# EAGLE board uino-1284p (EAGLE 5.11)
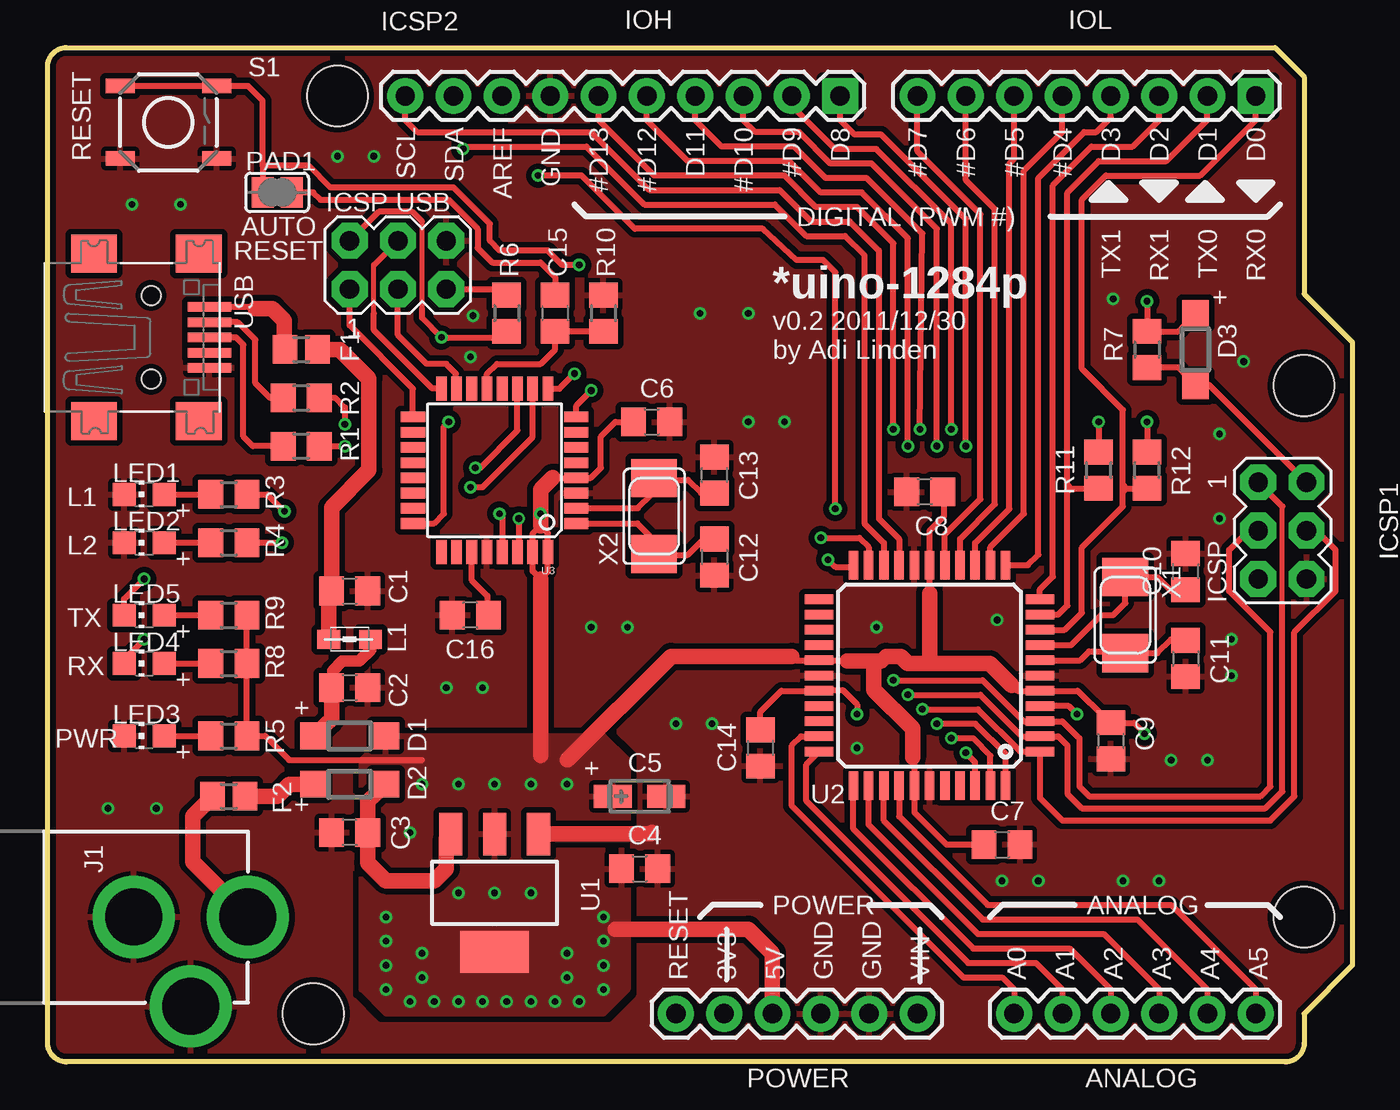
[diagram p0: board, top side]
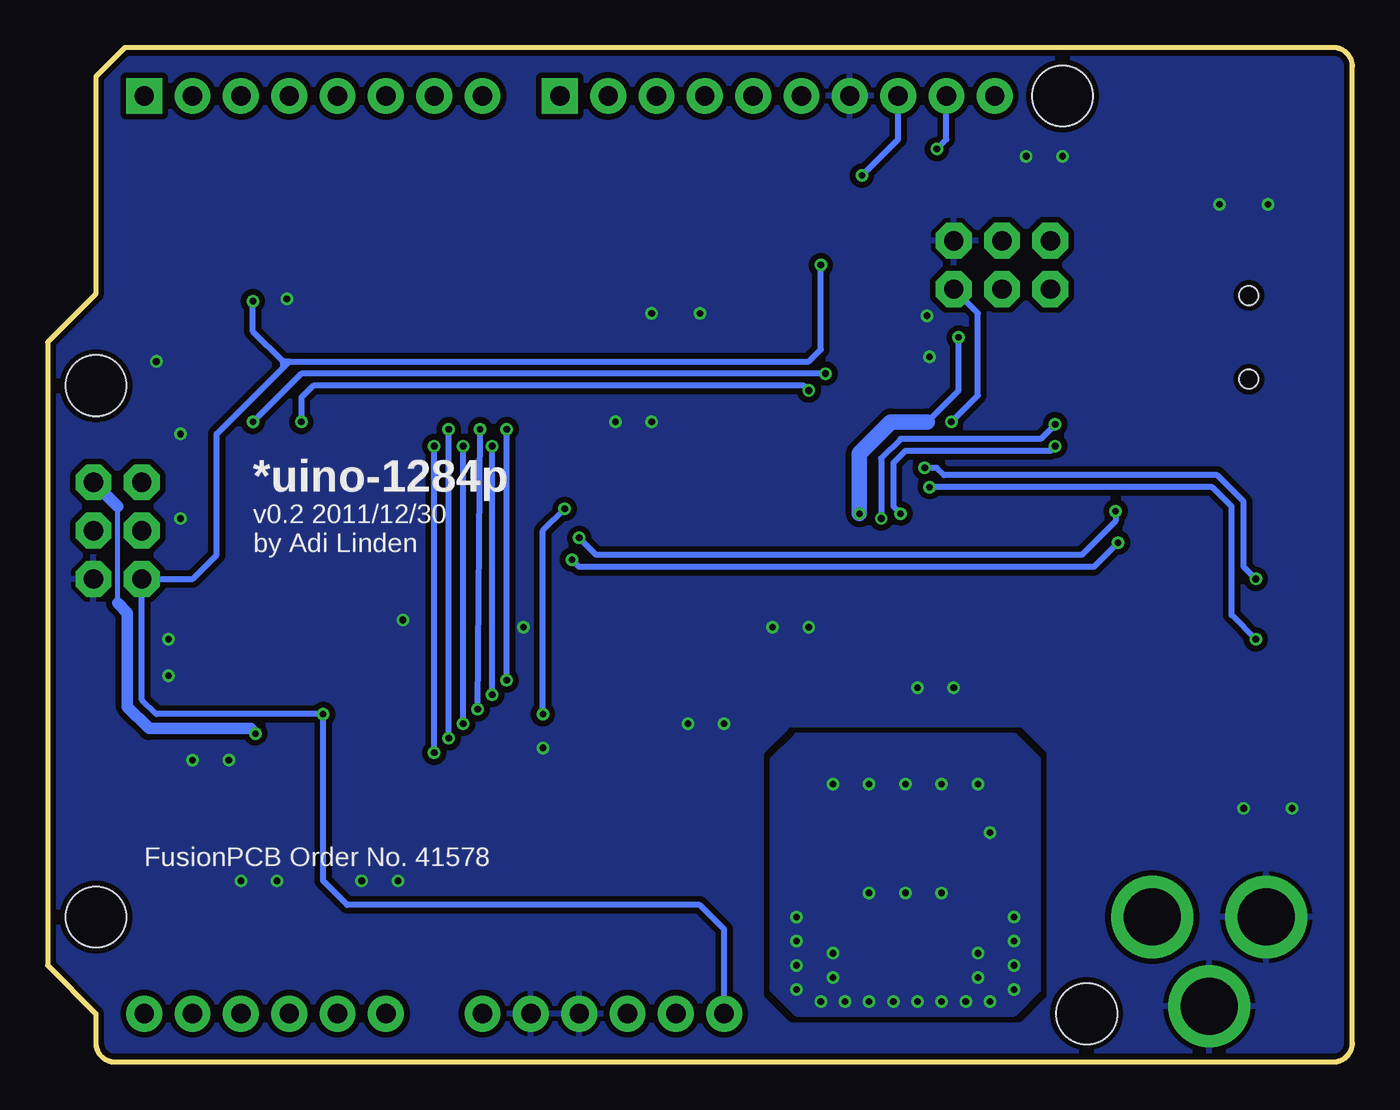
[diagram p1: board, bottom side, seen from below]

Size 68.58 x 53.34 mm. Coordinates in mm from the lower left corner, seen from the top.
Outline: 64.52,53.34 66.04,51.82 66.04,40.39 68.58,37.85 68.58,5.08 66.04,2.54 66.04,1 arc-90 65.04,0 1,0 arc-90 0,1 0,52.34 arc-90 1,53.34 64.52,53.34
Copper layers (1*16): Top 0.035mm / dielectric 1.5mm / Bottom 0.035mm
Design rules "Fusion_eagle_rule_v1.1": minimum track width 6mil, minimum drill 12mil, track to track 6mil, track to pad 6mil, pad to pad 6mil, via to via 6mil, smd to smd 0mil, copper to edge 10mil, drill to drill 10mil, minimum pad ring 10mil, minimum via ring 6mil, stop-mask expansion 2mil, vias tented up to drill 100mil, thermal gap 10mil
Holes 3.2 mm at 66.04,35.56 66.04,7.62 15.24,50.8 13.97,2.54

## Footprints (pad centres in the part's own frame; a part is rotated, then mirrored left to right if it is on the bottom)
1X06 = drill 1.016 pad 1.88 round: 1 0,0; 2 2.54,0; 3 5.08,0; 4 7.62,0; 5 10.16,0; 6 12.7,0
C0805 = smd 1.3 x 1.5: 1 -0.95,0; 2 0.95,0
CT3216 = smd 2 x 1.2: + -1.4,0; - 1.4,0
SOD123 = smd 1.4 x 1.4: A 1.9,0; C -1.9,0
R0805 = smd 1.3 x 1.5: 1 -0.85,0; 2 0.85,0
2X03 = drill 1.016 pad 1.88 octagon: 1 -2.54,-1.27; 2 -2.54,1.27; 3 0,-1.27; 4 0,1.27; 5 2.54,-1.27; 6 2.54,1.27
1X10 = drill 1.016 pad 1.88 square: 1 0,0 | drill 1.016 pad 1.88 round: 2 2.54,0; 3 5.08,0; 4 7.62,0; 5 10.16,0; 6 12.7,0; 7 15.24,0; 8 17.78,0; 9 20.32,0; 10 22.86,0
1X08 = drill 1.016 pad 1.88 square: 1 0,0 | drill 1.016 pad 1.88 round: 2 2.54,0; 3 5.08,0; 4 7.62,0; 5 10.16,0; 6 12.7,0; 7 15.24,0; 8 17.78,0
POWER_JACK_PTH = drill 2.997 pad 4.318 round: GND 0,7.7; GNDBREAK 4.7,10.7; PWR 0,13.7
0805 = smd 1.2 x 1: 1 -1.1,0; 2 1.1,0
CHIP-LED0805 = smd 1.2 x 1.2: A 0,-1.05; C 0,1.05
SJ = smd 1.168 x 1.6: 1 -0.762,0; 2 0.762,0
R0805' = smd 1.3 x 1.5: 1 -0.95,0; 2 0.95,0
TACTILE_SWITCH_SMD = smd 1.524 x 0.762: 1 -2.54,1.905; 2 2.54,1.905; 3 -2.54,-1.905; 4 2.54,-1.905
SOT223 = smd 1.219 x 2.235: 1 -2.311,-3.099; 2 0,-3.099; 3 2.311,-3.099 | smd 3.6 x 2.2: 4 0,3.099
TQFP44 = smd 1.5 x 0.5: 1 -5.8,4; 2 -5.8,3.2; 3 -5.8,2.4; 4 -5.8,1.6; 5 -5.8,0.8; 6 -5.8,0; 7 -5.8,-0.8; 8 -5.8,-1.6; 9 -5.8,-2.4; 10 -5.8,-3.2; 11 -5.8,-4; 23 5.8,-4; 24 5.8,-3.2; 25 5.8,-2.4; 26 5.8,-1.6; 27 5.8,-0.8; 28 5.8,0; 29 5.8,0.8; 30 5.8,1.6; 31 5.8,2.4; 32 5.8,3.2; 33 5.8,4 | smd 0.5 x 1.5: 12 -4,-5.8; 13 -3.2,-5.8; 14 -2.4,-5.8; 15 -1.6,-5.8; 16 -0.8,-5.8; 17 0,-5.8; 18 0.8,-5.8; 19 1.6,-5.8; 20 2.4,-5.8; 21 3.2,-5.8; 22 4,-5.8; 34 4,5.8; 35 3.2,5.8; 36 2.4,5.8; 37 1.6,5.8; 38 0.8,5.8; 39 0,5.8; 40 -0.8,5.8; 41 -1.6,5.8; 42 -2.4,5.8; 43 -3.2,5.8; 44 -4,5.8
TQFP32-08 = smd 1.27 x 0.559: 1 -4.293,2.8; 2 -4.293,2; 3 -4.293,1.2; 4 -4.293,0.4; 5 -4.293,-0.4; 6 -4.293,-1.2; 7 -4.293,-2; 8 -4.293,-2.8; 17 4.293,-2.8; 18 4.293,-2; 19 4.293,-1.2; 20 4.293,-0.4; 21 4.293,0.4; 22 4.293,1.2; 23 4.293,2; 24 4.293,2.8 | smd 0.559 x 1.27: 9 -2.8,-4.293; 10 -2,-4.293; 11 -1.2,-4.293; 12 -0.4,-4.293; 13 0.4,-4.293; 14 1.2,-4.293; 15 2,-4.293; 16 2.8,-4.293; 25 2.8,4.293; 26 2,4.293; 27 1.2,4.293; 28 0.4,4.293; 29 -0.4,4.293; 30 -1.2,4.293; 31 -2,4.293; 32 -2.8,4.293
USB-MINIB = smd 0.5 x 2.308: D+ 0,4.064; D- -0.8,4.064; GND 1.6,4.064; ID 0.8,4.064; VBUS -1.6,4.064 | smd 2 x 2.4: GND1 -4.4,-2; GND2 -4.4,3.5; GND3 4.4,3.5; GND4 4.4,-2 | hole 1: -2.2,1; 2.2,1
NX5032 = smd 2 x 2.4: P$1 2,0; P$2 -2,0

## Placement (x,y rotation side)
ANALOG  6x1  [1X06]  50.8,2.54 0 top
C1  0.01u  [C0805]  15.88,24.77 0 top
C2  0.1u  [C0805]  15.88,19.68 0 top
C3  0.1u  [C0805]  15.88,12.06 180 top
C4  0.1u  [C0805]  31.11,10.16 0 top
C5  10u  [CT3216]  31.11,13.97 0 top
C6  0.1u  [C0805]  31.75,33.66 0 top
C7  0.1u  [C0805]  50.16,11.43 0 top
C8  0.1u  [C0805]  46.1,29.97 180 top
C9  0.1u  [C0805]  55.88,16.89 270 top
C10  22p  [C0805]  59.82,25.78 90 top
C11  22p  [C0805]  59.82,21.21 270 top
C12  22p  [C0805]  35.05,26.54 270 top
C13  22p  [C0805]  35.05,30.86 90 top
C14  0.1u  [C0805]  37.47,16.51 270 top
C15  0.1u  [C0805]  26.67,39.37 270 top
C16  1u  [C0805]  22.23,23.5 180 top
D1  1A  [SOD123]  15.88,17.14 180 top
D2  1A  [SOD123]  15.88,14.61 180 top
D3  500mA  [SOD123]  60.33,37.47 90 top
F1  500mA  [R0805]  13.34,37.47 0 top
F2  800mA  [R0805]  9.53,13.97 0 top
ICSP1  [2X03]  64.9,27.94 270 top
ICSP2  [2X03]  18.41,41.91 0 top
IOH  10x1  [1X10]  41.66,50.8 180 top
IOL  8x1  [1X08]  63.5,50.8 180 top
J1  POWER_JACKPTH  [POWER_JACK_PTH]  -3.17,7.62 270 top
L1  Ferrite  [0805]  15.88,22.23 0 top
LED1  L1 (Red)  [CHIP-LED0805]  5.08,29.84 90 top
LED2  L2 (Red)  [CHIP-LED0805]  5.08,27.3 90 top
LED3  PWR (Green)  [CHIP-LED0805]  5.08,17.14 90 top
LED4  RX (Yellow)  [CHIP-LED0805]  5.08,20.95 90 top
LED5  TX (Yellow)  [CHIP-LED0805]  5.08,23.5 90 top
PAD1  [SJ]  12.06,45.72 180 top
POWER  6x1  [1X06]  33.02,2.54 0 top
R1  22  [R0805']  13.34,32.38 0 top
R2  22  [R0805']  13.34,34.92 0 top
R3  1k  [R0805']  9.53,29.84 0 top
R4  1k  [R0805']  9.53,27.3 0 top
R5  1k  [R0805']  9.53,17.14 0 top
R6  10k  [R0805']  24.13,39.37 270 top
R7  10k  [R0805']  57.78,37.47 270 top
R8  1k  [R0805']  9.53,20.95 0 top
R9  1k  [R0805']  9.53,23.5 0 top
R10  10k  [R0805']  29.21,39.37 270 top
R11  1k  [R0805']  55.24,31.11 90 top
R12  1k  [R0805']  57.78,31.11 90 top
S1  [TACTILE_SWITCH_SMD]  6.35,49.4 0 top
U1  LD117AS50TR  [SOT223]  23.5,8.89 180 top
U2  ATMEGA1284AU  [TQFP44]  46.35,20.32 180 top
U3  ATMEGA8U2AU  [TQFP32-08]  23.5,31.11 180 top
USB  MINI-USB-SHIELD-UX60-MB-5ST  [USB-MINIB]  4.45,38.1 270 top
X1  16MHz  [NX5032]  56.64,23.5 270 top
X2  16MHz  [NX5032]  31.88,28.7 90 top

## Library data of the parts
ANALOG IOL J1 POWER S1 U3 = SparkFun
C1-C16 R1-R12 = rcl
D1-D3 = diode
F1 F2 ICSP1 ICSP2 IOH U1 = adilinden
L1 = wuerth-elektronik
LED1-LED5 USB X1 X2 = adafruit
PAD1 = jumper
U2 = adilinden; MPN: ATMEGA644PV-10AU; OC_FARNELL: 1455123; OC_NEWARK: 58M3748

## Nets
3V3: POWER.2
A0: ANALOG.1 U2.32
A1: ANALOG.2 U2.33
A2: ANALOG.3 U2.34
A3: ANALOG.4 U2.35
A4: ANALOG.5 U2.36
A5: ANALOG.6 U2.37
AREF: C14.1 IOH.8 U2.29
D0: IOL.1 R12.1 U2.9
D1: IOL.2 R11.1 U2.10
D2: IOL.3 U2.11
D3: IOL.4 U2.12
D4: IOL.5 U2.13
D5: IOL.6 U2.14
D6: IOL.7 U2.15
D7: IOL.8 U2.16
D8: IOH.1 U2.42
D9: IOH.2 U2.43
D+: R1.2 U3.29
D-: R2.2 U3.30
GND: C1.2 C2.2 C3.2 C4.2 C5.- C6.2 C7.2 C8.2 C9.2 C10.2 C11.2 C12.2 C13.2 C14.2 C16.2 ICSP1.6 ICSP2.6 IOH.7 J1.GND J1.GNDBREAK LED1.C LED2.C LED3.C POWER.4 POWER.5 R10.1 S1.3 S1.4 U1.1 U2.6 U2.18 U2.28 U2.39 U3.3 U3.28 USB.GND
L1: R3.2 U2.21
L2: R4.2 U2.22
MISO: ICSP1.1 IOH.5 U2.2
MOSI: ICSP1.4 IOH.4 U2.1
N$1: D2.A F2.2
N$2: C1.1 F1.2 L1.1
N$3: C15.1 PAD1.1
N$4: R2.1 USB.D-
N$5: R1.1 USB.D+
N$6: R12.2 U3.9
N$7: R11.2 U3.8
N$8: C12.1 U3.1 X2.P$2
N$9: C13.1 U3.2 X2.P$1
N$10: C16.1 U3.27
N$11: LED1.A R3.1
N$12: LED2.A R4.1
N$13: ICSP2.1 U3.17
N$14: ICSP2.3 U3.15
N$15: ICSP2.5 R6.1 U3.24
N$16: ICSP2.4 U3.16
N$23: C10.1 U2.8 X1.P$2
N$24: C11.1 U2.7 X1.P$1
N$25: F2.1 J1.PWR
N$26: LED4.A R8.1
N$27: LED5.A R9.1
N$28: C3.1 D2.C U1.3
N$29: LED4.C U3.10
N$30: LED5.C U3.11
N$31: C15.2 R10.2 U3.13
N$34: LED3.A R5.1
N$36: U2.30
N$37: U2.31
N$50: U2.41
N$51: U2.40
N$52: U2.26
N$53: U2.25
N$54: U2.24
N$55: U2.23
RESET: D3.A ICSP1.5 PAD1.2 POWER.1 R7.1 S1.1 S1.2 U2.4
SCK: ICSP1.3 IOH.6 U2.3
SCL: IOH.10 U2.19
SDA: IOH.9 U2.20
SS: IOH.3 U2.44
UVCC: C2.1 D1.A L1.2
VBUS: F1.1 USB.VBUS
VCC: C4.1 C5.+ C6.1 C7.1 C8.1 C9.1 D1.C D3.C ICSP1.2 ICSP2.2 POWER.3 R5.2 R6.2 R7.2 R8.2 R9.2 U1.2 U1.4 U2.5 U2.17 U2.27 U2.38 U3.4 U3.31 U3.32
VIN: POWER.6

## Tracks (layer width: path | path; a pad name or v marks a point on that pad's centre or on a via)
A0
  Top 0.305: U2.32 39.6,17.12 39.12,16.64 39.12,13.46 48.13,4.45 50.16,4.45 50.8,3.81 ANALOG.1
A1
  Top 0.305: ANALOG.2 53.34,3.81 51.94,5.21 48.39,5.21 39.88,13.72 39.88,15.64 U2.33
A2
  Top 0.305: U2.34 42.35,12.26 48.64,5.97 53.72,5.97 55.88,3.81 ANALOG.3
A3
  Top 0.305: U2.35 43.16,12.47 48.9,6.73 55.5,6.73 58.42,3.81 ANALOG.4
A4
  Top 0.305: U2.36 43.95,12.69 49.15,7.49 57.28,7.49 60.96,3.81 ANALOG.5
A5
  Top 0.305: U2.37 44.76,12.9 49.4,8.26 59.05,8.26 63.5,3.81 ANALOG.6
AREF  (via drill 0.35)
  Top 0.305: v25.78,46.61 28.07,46.61 30.86,43.81 37.59,43.81 39.37,42.16 40.77,42.16 41.4,41.53 v41.4,29.08 | v42.55,18.29 42.55,18.8 41.78,19.56 40.59,19.56 U2.29 38.57,19.52 37.47,18.41 C14.1
  Bottom 0.305: IOH.8 23.88,48.51 v25.78,46.61 | v41.4,29.08 42.55,27.94 v42.55,18.29
D0
  Top 0.305: U2.9 53.45,22.72 54.36,23.62 54.36,27.05 56.52,29.21 56.52,29.97 | 56.52,29.97 56.52,30.35 | 56.52,30.35 56.52,34.29 54.36,36.45 54.36,45.34 55.63,46.61 60.58,46.61 63.5,49.53 IOL.1 | 56.7,30.16 R12.1 | 56.52,30.35 56.7,30.16 | 56.7,30.16 56.52,29.97
D1
  Top 0.305: U2.10 53.11,23.52 53.59,24 53.59,29.97 | 53.59,29.97 53.59,30.35 | 53.59,30.35 53.59,45.72 55.24,47.37 58.8,47.37 60.96,49.53 IOL.2 | 53.78,30.16 R11.1 | 53.59,30.35 53.78,30.16 | 53.78,30.16 53.59,29.97
D2
  Top 0.305: U2.11 52.16,24.85 52.83,25.53 52.83,46.1 54.86,48.13 57.02,48.13 58.42,49.53 IOL.3
D3
  Top 0.305: U2.12 51.52,26.12 52.07,26.67 52.07,46.48 54.48,48.9 55.12,48.9 55.88,49.66 IOL.4
D4
  Top 0.305: U2.13 49.55,27.08 51.31,28.83 51.31,46.86 53.34,48.9 IOL.5
D5
  Top 0.305: U2.14 48.76,27.29 50.55,29.08 50.55,47.24 50.8,47.5 IOL.6
D6
  Top 0.305: U2.15 47.95,27.51 49.78,29.34 49.78,44.83 48.26,46.35 IOL.7
D7
  Top 0.305: U2.16 47.16,27.72 49.02,29.59 49.02,44.58 45.72,47.88 IOL.8
D8  (via drill 0.35)
  Top 0.305: U2.42 48.76,15.76 v48.26,16.26 | v48.26,32.38 48.26,44.32 43.81,48.77 42.42,48.77 41.66,49.53 IOH.1
  Bottom 0.305: v48.26,16.26 v48.26,32.38
D9  (via drill 0.35)
  Top 0.305: U2.43 49.55,16.1 48.64,17.02 v47.5,17.02 | v47.5,33.27 47.5,44.07 43.56,48.01 41.4,48.01 39.12,50.29 IOH.2
  Bottom 0.305: v47.5,17.02 v47.5,33.27
D+  (via drill 0.35)
  Top 0.305: v23.75,28.83 23.89,28.68 U3.29 | R1.2 v15.62,32.38
  Bottom 0.305: v23.75,28.83 24.13,29.21 24.13,31.5 23.5,32.13 15.88,32.13 v15.62,32.38
D-  (via drill 0.35)
  Top 0.305: v24.77,28.57 24.77,26.89 U3.30 | R2.2 15.11,34.92 15.62,34.42 v15.62,33.53
  Bottom 0.305: v24.77,28.57 24.77,31.75 23.75,32.77 16.38,32.77 v15.62,33.53
GND  (via drill 0.35)
  Top 0.813: U1.1 31.67,11.99 31.75,12.06
  other vias: 22.86,19.68 20.95,19.68 28.57,22.86 30.48,22.86 33.02,17.78 34.92,17.78 42.55,16.51 56.52,9.53 43.56,22.86 52.07,9.53 50.16,9.53 58.42,9.53 59.05,15.88 60.96,15.88 61.59,33.02 61.59,28.57 62.87,36.83 56.01,40.13 36.83,39.37 34.29,39.37 36.83,33.66 38.73,33.66 3.17,13.34 5.71,13.34 15.24,47.62 17.14,47.62 4.45,45.09 6.99,45.09 22.23,37.08 49.91,23.24 62.23,20.32 62.23,22.23 22.35,39.24
  pour Top (isolate 0.305, rank 5): 0,53.34 68.58,53.34 68.58,0 0,0
  pour Bottom (isolate 0.305, rank 5): 0,53.34 68.58,53.34 68.58,0 0,0
L1  (via drill 0.35)
  Top 0.305: U2.21 43.16,27.08 42.67,27.56 v40.64,27.56 | R3.2 11.56,29.84 v12.45,28.96
  Bottom 0.305: v12.45,28.96 12.45,28.45 14.22,26.67 39.75,26.67 v40.64,27.56
L2  (via drill 0.35)
  Top 0.305: U2.22 42.27,26.04 41.4,26.04 v41.02,26.42 | R4.2 v12.32,27.3
  Bottom 0.305: v12.32,27.3 13.59,26.04 40.64,26.04 v41.02,26.42
MISO  (via drill 0.35)
  Top 0.254: 64.9,24.13 64.9,29.21
  Top 0.305: v45.21,19.3 49.02,19.3 51.21,17.12 U2.2 53.11,17.12 53.59,16.64 53.59,14.1 54.36,13.34 64.01,13.34 64.9,14.22 64.9,24.13 | 64.9,29.21 ICSP1.1 | v45.21,32.38 45.21,43.31 42.8,45.72 40.64,45.72 38.99,47.37 33.66,47.37 31.5,49.53 IOH.5
  Bottom 0.305: v45.21,19.3 v45.21,32.38
MOSI  (via drill 0.35)
  Top 0.305: v45.97,18.54 48.9,18.54 51.12,16.32 U2.1 52.16,13.88 53.34,12.7 64.26,12.7 65.53,13.97 65.53,22.61 67.69,24.77 67.69,26.92 66.67,27.94 ICSP1.4 | v45.85,33.27 45.97,43.56 43.05,46.48 40.89,46.48 39.24,48.13 35.43,48.13 34.04,49.53 IOH.4
  Bottom 0.305: v45.97,18.54 v45.85,33.27
N$1
  Top 0.813: D2.A 12.7,14.61 12.06,13.97 F2.2
N$2
  Top 0.813: L1.1 14.78,24.61 C1.1 14.93,29.15 16.89,31.11 16.89,35.94 15.37,37.47 F1.2
N$3
  Top 0.305: C15.1 26.67,41.27 25.91,42.04 23.37,42.04 22.61,42.8 22.61,43.81 21.08,45.34 14.35,45.34 13.97,45.72 PAD1.1
N$4
  Top 0.305: USB.D- 9.99,38.9 10.92,37.97 10.92,35.69 11.68,34.92 R2.1
N$5
  Top 0.305: USB.D+ 9.91,38.1 10.29,37.72 10.29,32.89 10.79,32.38 R1.1
N$6  (via drill 0.35)
  Top 0.305: v27.69,36.2 26.9,35.41 U3.9 | v57.78,33.66 R12.2
  Bottom 0.305: v27.69,36.2 55.24,36.2 v57.78,33.66
N$7  (via drill 0.35)
  Top 0.305: v28.57,35.31 27.79,34.52 U3.8 | v55.24,33.66 R11.2
  Bottom 0.305: v28.57,35.31 28.83,35.56 54.61,35.56 55.24,34.92 v55.24,33.66
N$8
  Top 0.305: U3.1 30.99,28.32 31.88,27.43 X2.P$2 31.91,26.67 33.66,26.67 34.48,27.49 C12.1
N$9
  Top 0.305: U3.2 31.02,29.11 31.75,29.84 31.75,30.57 X2.P$1 31.97,30.61 33.66,30.61 34.35,29.91 C13.1
N$10
  Top 0.305: U3.27 22.3,25.33 23.11,24.51 23.11,23.56 C16.1
N$11
  Top 0.305: LED1.A R3.1
N$12
  Top 0.305: LED2.A R4.1
N$13
  Top 0.305: ICSP2.1 15.88,38.73 19.2,35.41 U3.17
N$14
  Top 0.305: ICSP2.3 18.41,38.23 19.94,36.7 20.95,36.7 21.46,36.2 21.46,35.44 U3.15
N$15  (via drill 0.35)
  Top 0.305: U3.24 20.31,28.32 20.83,28.83 20.83,33.4 v21.08,33.66 | ICSP2.5 23.81,40.64 R6.1
  Bottom 0.305: ICSP2.5 19.68,39.37 19.68,35.05 v21.08,33.66
N$16
  Top 0.254: 17.14,39.37 17.14,41.91
  Top 0.305: 17.14,41.91 ICSP2.4 | 17.14,39.37 17.14,38.48 20.19,35.43 20.67,35.43 U3.16
N$23
  Top 0.305: U2.8 53.8,21.92 55.37,23.5 56.01,23.5 56.64,24.13 X1.P$2 58.33,25.5 59.05,24.77 59.75,24.77 C10.1
N$24
  Top 0.305: U2.7 54.27,21.12 54.74,21.59 56.55,21.59 X1.P$1 58.33,21.5 59.05,22.23 59.75,22.23 C11.1
N$25
  Top 0.813: F2.1 7.62,12.91 7.62,10.53 J1.PWR
N$26
  Top 0.305: LED4.A R8.1
N$27
  Top 0.305: LED5.A R9.1
N$28
  Top 0.813: D2.C 16.82,13.71 C3.1 16.82,10.48 17.78,9.53 20.32,9.53 20.95,10.16 20.95,11.76 U1.3
N$29  (via drill 0.35)
  Top 0.305: LED4.C 4.03,21.18 v5.08,22.23 | U3.10 25.5,32.86 22.86,30.23 v22.23,30.23
  Bottom 0.305: v5.08,22.23 6.35,23.5 6.35,29.21 7.37,30.23 v22.23,30.23
N$30  (via drill 0.35)
  Top 0.305: LED5.C 4.03,24.35 v5.08,25.4 | U3.11 24.7,33.2 22.73,31.24 v22.48,31.24
  Bottom 0.305: v5.08,25.4 5.71,26.04 5.71,29.46 7.11,30.86 21.46,30.86 21.84,31.24 v22.48,31.24
N$31
  Top 0.305: R10.2 C15.2 26.67,37.47 25.91,36.7 23.62,36.7 23.09,36.18 U3.13
N$34
  Top 0.305: LED3.A R5.1
RESET  (via drill 0.35)
  Top 0.305: S1.1 S1.2 10.54,51.31 11.3,50.55 11.3,47.12 | 11.3,47.12 PAD1.2 | U2.4 53.67,18.72 v54.1,18.29 | 11.3,47.12 13.72,47.12 14.86,45.97 21.34,45.97 23.24,44.07 23.24,43.18 23.75,42.67 26.29,42.67 27.05,41.91 v27.94,41.91 | v57.78,40.01 R7.1 59.42,38.41 D3.A
  Bottom 0.305: v27.94,41.91 27.94,37.47 28.57,36.83 55.88,36.83 | 56.2,36.51 55.88,36.83 | 55.88,36.83 56.2,36.83 | 56.2,36.83 R7.1 v57.78,40.01 | 56.2,36.51 56.2,36.83 | 56.2,36.51 59.69,33.02 59.69,26.67 60.96,25.4 ICSP1.5 63.63,19.05 62.87,18.29 v54.1,18.29 54.1,9.53 52.83,8.26 34.29,8.26 33.02,6.99 POWER.1
SCK  (via drill 0.35)
  Top 0.305: v44.45,20.07 49.15,20.07 51.3,17.92 U2.3 53.33,17.92 54.23,17.02 54.23,14.48 54.74,13.97 63.75,13.97 64.26,14.48 64.26,22.61 62.1,24.77 62.1,26.92 63.12,27.94 ICSP1.3 | v44.45,33.27 44.45,43.05 42.55,44.96 40.39,44.96 38.73,46.61 31.88,46.61 28.96,49.53 IOH.6
  Bottom 0.305: v44.45,20.07 v44.45,33.27
SCL
  Top 0.305: U2.19 44.76,27.51 43.69,28.57 43.69,42.67 42.16,44.2 40.13,44.2 38.48,45.85 31.62,45.85 28.57,48.9 19.43,48.9 18.8,49.53 IOH.10
SDA  (via drill 0.35)
  Top 0.305: U2.20 43.95,27.29 42.93,28.32 42.93,42.42 41.91,43.43 39.88,43.43 38.23,45.09 31.37,45.09 28.32,48.13 21.97,48.13 v21.84,48.01
  Bottom 0.305: IOH.9 21.34,48.51 v21.84,48.01
SS  (via drill 0.35)
  Top 0.305: U2.44 50.35,16.19 48.77,17.78 v46.74,17.78 | v46.74,32.38 46.74,43.81 43.31,47.24 41.15,47.24 39.5,48.9 37.21,48.9 36.58,49.53 IOH.3
  Bottom 0.305: v46.74,17.78 v46.74,32.38
UVCC
  Top 0.61: L1.2 16.98,21.67 16.38,21.08 15.49,21.08 14.99,20.57 14.99,19.75 C2.1
  Top 0.813: C2.1 14.93,18.05 D1.A
VBUS
  Top 0.305: USB.VBUS 10.85,39.7 10.92,39.62
  Top 0.813: 10.92,39.62 11.81,39.62 12.45,38.99 12.45,37.5 F1.1
VCC  (via drill 0.35)
  Top 0.254: 19.68,39.62 19.68,44.2
  Top 0.305: R9.2 R8.2 R5.2 11.43,17.14 12.7,15.88 19.68,15.88 | ICSP2.2 17.4,44.7 19.18,44.7 19.68,44.2 | 19.68,39.62 19.68,39.12 v20.7,38.1 23.81,38.1 R6.2 | C6.1 29.84,33.66 29.08,32.89 29.08,31.24 28.56,30.71 U3.4 26.56,30.71 26.54,30.73 | 50.67,19.81 50.97,19.52 U2.5 54.14,19.52 55.5,18.16 55.56,18.16 C9.1 57.09,17.84 v57.66,17.27 | 46.35,24.64 U2.17 46.35,27.94 47.12,28.7 47.12,29.91 C8.1 | 42.04,21.08 42,21.12 U2.27 39.33,21.12 39.12,21.34 | C7.1 47.24,11.43 45.55,13.12 U2.38 45.55,15.91 45.47,16 | R7.2 59.42,36.52 D3.C 61.03,35.62 ICSP1.2 | U3.31 25.5,27.78 25.91,28.19 26.3,27.81 U3.32 26.3,25.79 25.91,25.4 25.5,25.81 U3.31
  Top 0.813: 25.91,28.19 v25.91,28.83 25.91,30.1 26.54,30.73 | 50.67,19.81 49.53,20.95 46.35,20.95 | 42.04,21.08 43.43,21.08 | 43.43,21.08 43.81,21.08 44.07,21.34 44.83,21.34 45.21,20.95 46.35,20.95 | 43.43,21.08 43.43,19.56 45.47,17.53 45.47,16 | 46.35,20.95 46.35,24.64 | 25.91,16.13 25.91,25.4 | 39.12,21.34 32.77,21.34 27.3,15.88 | POWER.3 38.1,5.71 36.83,6.99 29.84,6.99
  Bottom 0.254: 64.9,24.13 64.9,29.21
  Bottom 0.305: 22.35,33.66 20.7,35.31 v20.7,38.1
  Bottom 0.61: v57.66,17.27 57.91,17.53 63.25,17.53 64.39,18.67 64.39,23.62 64.9,24.13 | 64.9,29.21 ICSP1.2
  Bottom 0.813: 22.35,33.66 24.26,33.66 25.91,32 v25.91,28.83
  other vias: 17.78,7.62 17.78,6.35 17.78,5.08 17.78,3.81 29.21,3.81 29.21,5.08 29.21,6.35 29.21,7.62 25.4,8.89 23.5,8.89 21.59,8.89 19.68,14.61 21.59,14.61 23.5,14.61 25.4,14.61 27.3,14.61 19.05,12.06 19.05,3.17 20.32,3.17 21.59,3.17 22.86,3.17 24.13,3.17 25.4,3.17 26.67,3.17 27.94,3.17 19.68,5.71 19.68,4.45 27.3,4.45 27.3,5.71
  pour Top (isolate 0.305, no thermals): 19.68,6.99 27.3,6.99 27.3,3.81 19.68,3.81
  pour Top (isolate 0.305, rank 2): 29.21,2.54 17.78,2.54 16.51,3.81 16.51,15.88 17.78,17.14 29.21,17.14 30.48,15.88 30.48,3.81
  pour Bottom (isolate 0.305): 17.78,2.54 16.51,3.81 16.51,15.88 17.78,17.14 29.21,17.14 30.48,15.88 30.48,3.81 29.21,2.54

## Text on the board
tPlace: SCL | SDA | AREF | GND | #D13 | #D12 | D11 | #D10 | #D9 | D8 | #D7 | #D6 | #D5 | #D4 | D3 | D2 | D1 | D0 | RESET | ICSP USB | DIGITAL (PWM #) | TX1 | RX1 | TX0 | RX0 | AUTO | RESET | + | *uino-1284p | 1 | v0.2 2011/12/30 | by Adi Linden | 1 | L1 | L2 | ICSP | TX | RX | + | PWR | + | + | POWER | ANALOG | RESET | 3V3 | 5V | GND | GND | VIN | A0 | A1 | A2 | A3 | A4 | A5
bPlace: *uino-1284p | v0.2 2011/12/30 | by Adi Linden | FusionPCB Order No. 41578